# Altium PCB PCB1.PcbDoc
Units mm, origin at the board's own origin, x right, y up, seen from the top; angles counter-clockwise.
Board outline 150 x 90 mm, 2 copper layers (Top Layer, Bottom Layer), stack 1.569 mm thick; 23 components, 46 nets, 127 pads, 4 vias.
Unrouted connection lines stored in the file: 10.
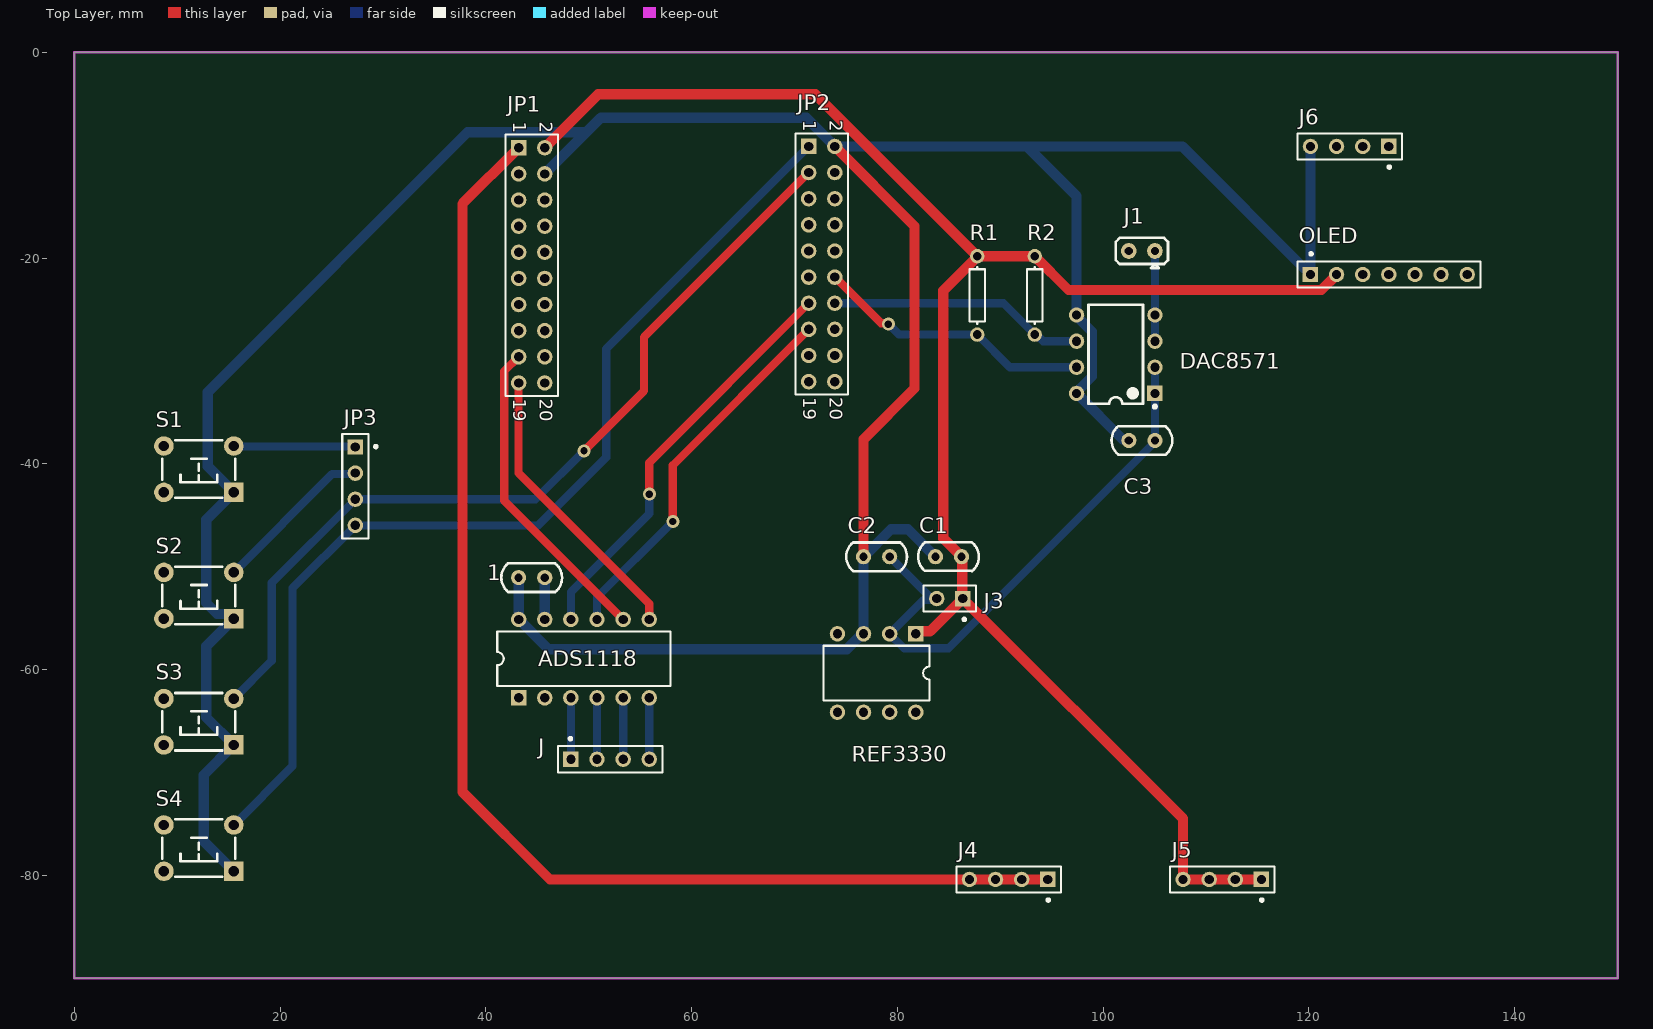
[diagram p0: Top Layer view]
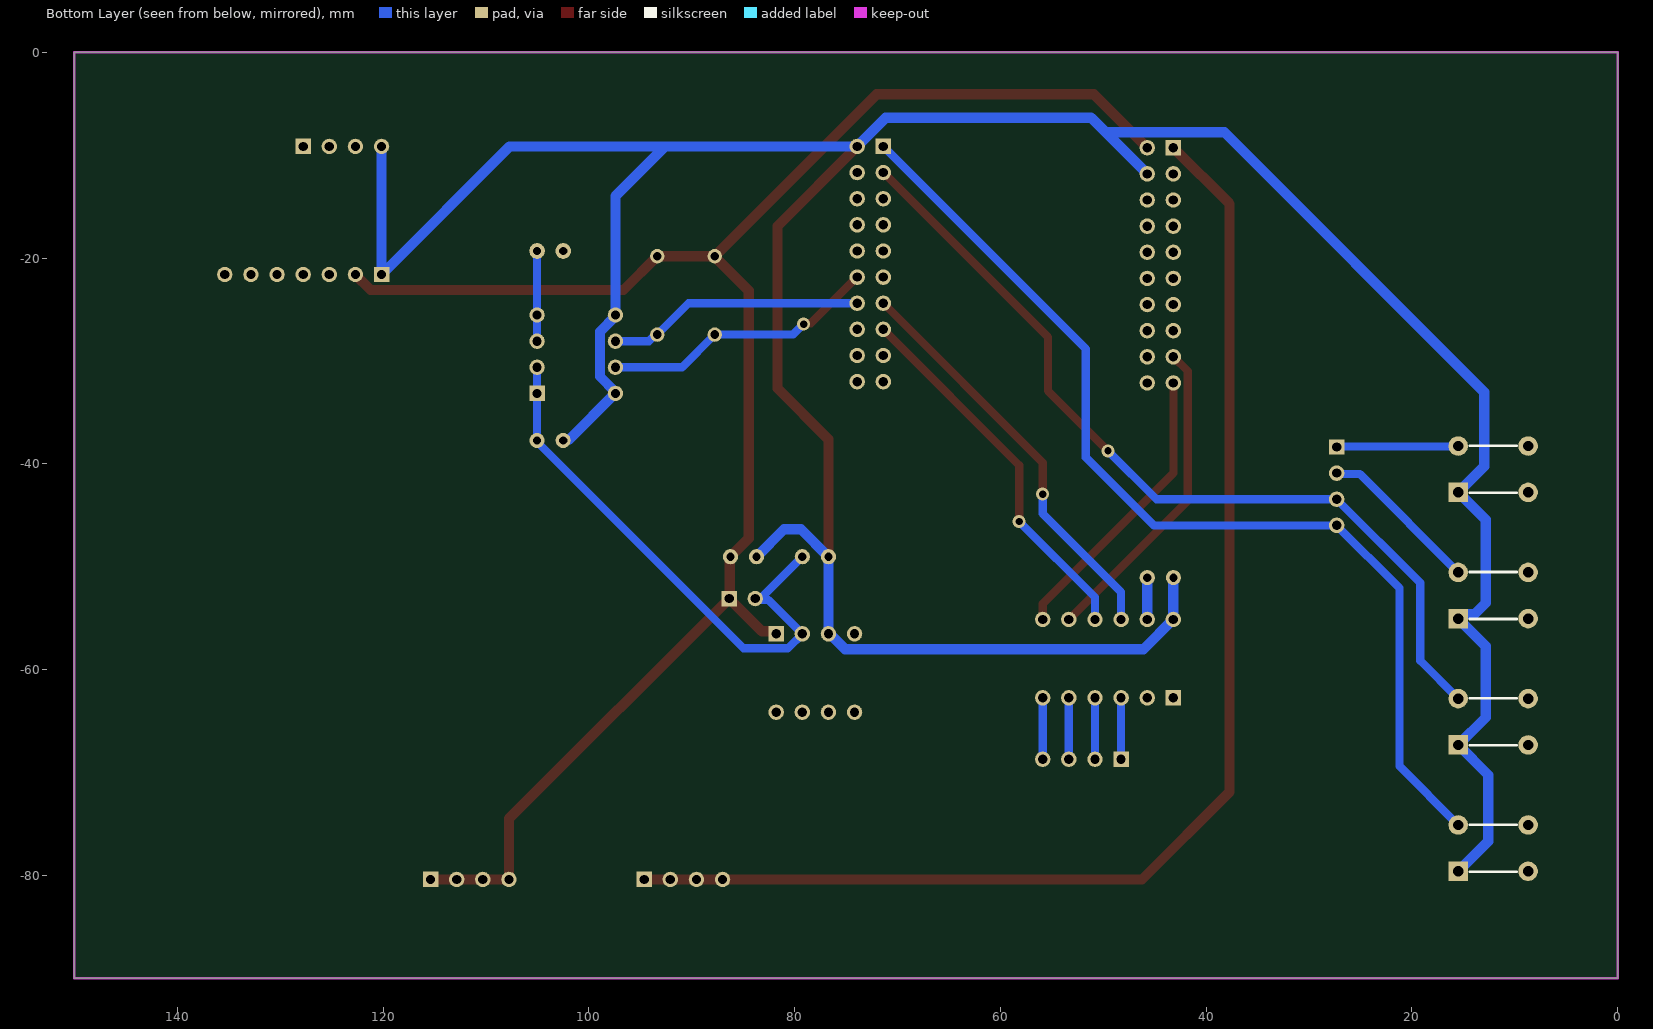
[diagram p1: Bottom Layer view, seen from below]
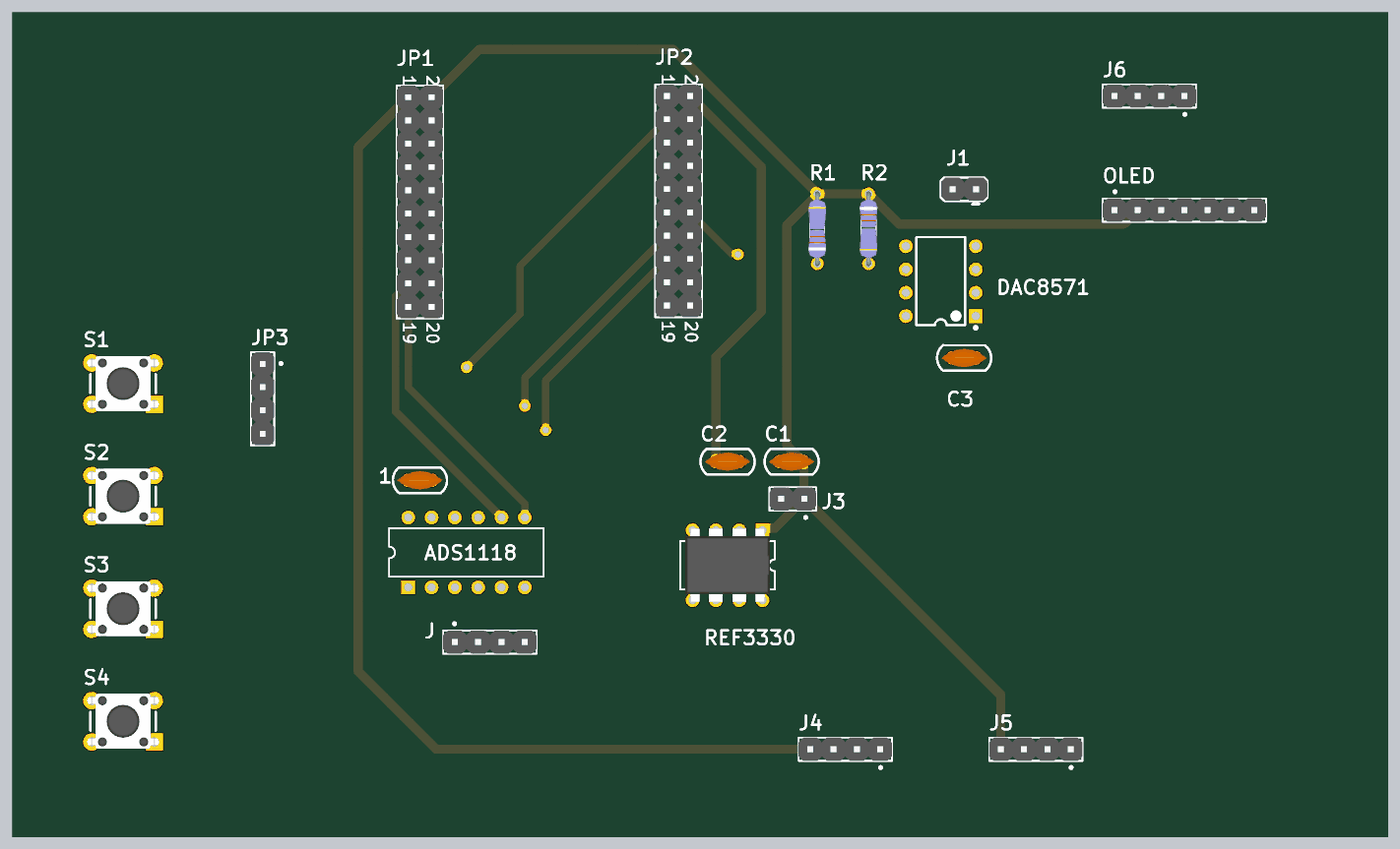
[diagram p2: 3D render of the assembled board from above, using the file's embedded part models]

## Layer stack, top to bottom
Top Solder: solder mask 0.0254, SM-001, Dk 4
Top Layer: signal copper 0.035
Dielectric 1: core 1.4986, Core-043, Dk 4.3
Bottom Layer: signal copper 0.035
Bottom Solder: solder mask 0.0254, SM-001, Dk 4

## Board outline
0,-90 150,-90 150,0 0,0

## Design rules (kind name [scope] priority, off if disabled: settings)
Clearance [All] p1: gap=0.254 ignorepadtopadclearanceinfootprint=FALSE except(0: Arc-Hole Track-Hole SMDPad-Hole THPad-Hole Via-Hole Fill-Hole Poly-Hole Region-Hole Text-Hole)
PolygonConnect [All] p1: connectstyle=Relief reliefconductorwidth=0.254 reliefentries=4 polygonreliefangle="90 Angle" airgapwidth=0.254
RoutingVias [All] p1: holewidth=0.711 width=1.27 viastyle="Through Hole" minholewidth=0.711 minwidth=1.27 maxholewidth=0.711 maxwidth=1.27
SolderMaskExpansion [All] p1: expansion=0.102 istentingtop=FALSE
Width VCC [InNet('5V')] p1: maxlimit=1 minlimit=1 preferedwidth=1 minimp=50.000000 maximp=50.000000 favimp=50.000000
Width VCC_2 [InNet('3.3V')] p2: maxlimit=1 minlimit=1 preferedwidth=1 minimp=50.000000 maximp=50.000000 favimp=50.000000
Width VCC_1 [InNet('3V3')] p3: maxlimit=1 minlimit=1 preferedwidth=1 minimp=50.000000 maximp=50.000000 favimp=50.000000
Width GND [InNet('GND')] p4: maxlimit=1 minlimit=1 preferedwidth=1 minimp=50.000000 maximp=50.000000 favimp=50.000000
Width [All] p5: maxlimit=0.8 minlimit=0.8 preferedwidth=0.8 minimp=50.000000 maximp=50.000000 favimp=50.000000
30 further rules are at their usual default settings.

## Components (designator, comment, footprint, x,y, rotation, side; value= is the part's Value field where it differs from the comment)
1 "0.1uF" cap-0.1 44.45,-51.054 r180 top
ADS1118 "ADS1118" DIP-12/SW 49.53,-58.928 r0 top
C1 "4.7uF" cap-0.1 84.963,-49.022 r0 top
C2 "4.7uF" cap-0.1 77.978,-49.022 r180 top
C3 "0.1uF" cap-0.1 103.759,-37.719 r180 top
DAC8571 "DAC-X" DIP-8#1 101.219,-29.337 r180 top
J "HEADER_RIGHT" HDR1X4 48.26,-68.707 r0 top
J1 "CON1" DIP-2 103.759,-19.304 r90 top
J3 "CON2" HDR1X2 86.36,-53.086 r180 top
J4 "CON4" HDR1X4 94.615,-80.391 r180 top
J5 "CON4" HDR1X4 115.379,-80.391 r180 top
J6 "CON4" HDR1X4 127.762,-9.144 r180 top
JP1 "HEADER 10X2" HDR2X10 43.18,-9.271 r270 top
JP2 "HEADER 10X2" HDR2X10 71.374,-9.144 r270 top
JP3 "4 HEADER" HDR1X4 27.305,-38.354 r270 top
OLED "SSD1351" HDR1X7 120.142,-21.59 r0 top
R1 "10K" AXIAL-0.3-R 87.757,-23.622 r90 top
R2 "10K" AXIAL-0.3-R 93.345,-23.622 r270 top
REF3330 "REF3330" DIP-8#2 81.788,-56.515 r180 top
S1 "" "TSW DIP-6*6*7" 12.094,-40.513 r180 top
S2 "" "TSW DIP-6*6*7" 12.094,-52.79 r180 top
S3 "" "TSW DIP-6*6*7" 12.094,-65.066 r180 top
S4 "" "TSW DIP-6*6*7" 12.094,-77.343 r180 top

## Footprints (in the part's own frame and the unit in brackets; to place one, negate y for a bottom-side part, rotate by r counter-clockwise, add the part's x,y. Pads: shape width x height; smd on the part's side, far side on the other; paste and mask are expansions set on the pad)
AXIAL-0.3-R [mm] "1/8W"
  round 1.4 hole 0.85: 1(-3.81,0) 2(3.81,0)
  silkscreen extent -2.77,-0.76 2.77,0.76, body extent -4.06,-0.97 4.06,0.97, height 1.94
cap-0.1 [mil] "瓷片电容"
  round 58 hole 31.5: 1(-50,0) 2(50,0)
  silkscreen extent -116,-55 116,55, body extent -97,-39 97,39, height 226
DIP-2 [mil]
  round 60 hole 32: 1(0,-50) 2(0,50)
  silkscreen extent -65,-100 50,100, body extent -50,-101 50,99, height 336
DIP-8#1 [mm]
  rect 1.5x1.5 hole 0.9: 1(-3.81,3.81)
  round 1.5 hole 0.9: 2(-3.81,1.27) 3(-3.81,-1.27) 4(-3.81,-3.81) 5(3.81,-3.81) 6(3.81,-1.27) 7(3.81,1.27) 8(3.81,3.81)
  silkscreen extent -3.95,-4.8 2.65,5.24
DIP-8#2 [mm]
  rect 1.5x1.5 hole 0.9: 1(0,0)
  round 1.5 hole 0.9: 2(2.54,0) 3(5.08,0) 4(7.62,0) 5(7.62,7.62) 6(5.08,7.62) 7(2.54,7.62) 8(0,7.62)
  silkscreen extent -1.34,1.16 8.96,6.46, body extent -0.82,-0.22 8.45,7.84, height 3.8
DIP-12/SW [mm] "DIP Switch; 12 Leads"
  rect 1.5x1.5 hole 0.9: 1(-6.35,-3.81)
  round 1.5 hole 0.9: 2(-3.81,-3.81) 3(-1.27,-3.81) 4(1.27,-3.81) 5(3.81,-3.81) 6(6.35,-3.81) 7(6.35,3.81) 8(3.81,3.81) 9(1.27,3.81) 10(-1.27,3.81) 11(-3.81,3.81) 12(-6.35,3.81)
  silkscreen extent -8.43,-2.65 8.41,2.65
HDR1X2 [mm] "Connector; Header; 2 Position"
  rect 1.5x1.5 hole 0.9: 1(0,0)
  round 1.5 hole 0.9: 2(2.54,0)
  silkscreen extent -1.27,-1.27 3.81,2.17, body extent -1.27,-1.27 3.81,1.27, height 8.54
HDR1X4 [mm] "Connector; Header; 4 Position"
  rect 1.5x1.5 hole 0.9: 1(0,0)
  round 1.5 hole 0.9: 2(2.54,0) 3(5.08,0) 4(7.62,0)
  silkscreen extent -1.27,-1.27 8.89,2.14, body extent -1.27,-1.27 8.89,1.27, height 8.54
HDR1X7 [mm] "Connector; Header; 7 Position"
  rect 1.5x1.5 hole 0.9: 1(0,0)
  round 1.5 hole 0.9: 2(2.54,0) 3(5.08,0) 4(7.62,0) 5(10.16,0) 6(12.7,0) 7(15.24,0)
  silkscreen extent -1.27,-1.27 16.51,2.14, body extent -1.27,-1.27 16.51,1.27, height 8.54
HDR2X10 [mm] "Connector; Header; 10x2 Position"
  rect 1.5x1.5 hole 0.9: 1(0,0)
  round 1.5 hole 0.9: 2(0,2.54) 3(2.54,0) 4(2.54,2.54) 5(5.08,0) 6(5.08,2.54) 7(7.62,0) 8(7.62,2.54) 9(10.16,0) 10(10.16,2.54) 11(12.7,0) 12(12.7,2.54) 13(15.24,0) 14(15.24,2.54) 15(17.78,0) 16(17.78,2.54) 17(20.32,0) 18(20.32,2.54) 19(22.86,0) 20(22.86,2.54)
  silkscreen extent -1.27,-1.27 24.13,3.81, body extent -1.27,-1.27 24.13,3.81, height 8.54
"TSW DIP-6*6*7" [mm] "6*6*7mm"
  rect 1.9x1.9 hole 1: 1(-3.4,2.25)
  round 1.9 hole 1: 2(-3.4,-2.25) 3(3.4,-2.25) 4(3.4,2.25)
  silkscreen extent -3.56,-2.79 3.56,2.79, body extent -4.11,-3 4.11,3, height 6.95

## Part data
1 C1 C2 C3: library part CAP, "Capacitor"
J1 J3 J4 J5 J6: "Connector"
JP3: "4 Pin Header"
R1 R2: library part RES2
S1 S2 S3 S4: library part SW-PB

## Via types
v1: diameter 1.27, hole 0.711, Top Layer to Bottom Layer, 4 vias

## Nets (pads, with @x,y where several pads share a name; then routed paths per layer and width w, separated by ;. In a path a pad name is that pad's centre, name@x,y a point inside that pad or via, vN(x,y) a via of type N, cw(c..) or ccw(c..) an arc to the next point about the centre after c; other vN are vias at no path point)
3.3V: 1.1 ADS1118.11 | length 4.1
  Bottom Layer w1: ADS1118.11 1.1
3V3: J4.1 J4.2 J4.3 J4.4 JP1.1 | length 125.3
  Top Layer w1: JP1.1 37.719,-14.732 37.719,-71.882 46.228,-80.391 J4.4 J4.3 J4.2 J4.1
5V: C1.2 J3.1 J5.1 J5.2 J5.3 J5.4 JP1.2 OLED.2 R1.2 R2.1 REF3330.1 | length 172.9
  Top Layer w1: JP1.2 50.927,-4.064 72.009,-4.064 R1.2 ; REF3330.1 82.027,-56.276 83.17,-56.276 J3.1 ; J5.1 J5.2 J5.3 J5.4 107.759,-74.486 J3.1 ; OLED.2 122.682,-21.616 121.204,-23.094 96.627,-23.094 R2.1 R1.2 ; J3.1 86.296,-53.023 86.296,-49.085 C1.2 84.455,-47.244 84.455,-23.177 87.757,-19.875 R1.2
GND: 1.2 ADS1118.12 C1.1 C2.2 C3.2 DAC8571.5 DAC8571.8 J6.1 J6.2 J6.3 J6.4 JP1.4 JP2.2 OLED.1 REF3330.3 S1.1 S2.1 S3.1 S4.1 | length 333.3
  Top Layer w1: JP2.2 81.661,-16.891 81.661,-32.639 76.708,-37.592 C2.2
  Bottom Layer w1: S4.1 12.573,-76.672 12.573,-70.237 S3.1 12.827,-64.649 12.827,-57.707 S2.1 15.044,-54.59 13.9,-54.59 12.827,-53.516 12.827,-45.43 S1.1 12.954,-40.223 12.954,-33.02 38.207,-7.767 49.764,-7.767 ; 1.2 ADS1118.12 46.081,-58.019 75.069,-58.019 76.573,-56.515 REF3330.3 C2.2 79.375,-46.355 81.026,-46.355 C1.1 ; JP1.4 49.764,-7.767 ; C3.2 102.398,-37.628 101.89,-37.628 DAC8571.8 97.409,-33.012 98.913,-31.508 98.913,-27.166 97.409,-25.662 DAC8571.5 97.409,-13.97 92.583,-9.144 ; J6.4 OLED.1 107.696,-9.144 92.583,-9.144 ; 49.764,-7.767 51.181,-6.35 71.146,-6.35 73.914,-9.118 JP2.2 92.583,-9.144
NetADS1118_3: ADS1118.3 J.1 | length 6
  Bottom Layer w0.8: J.1 ADS1118.3
NetADS1118_4: ADS1118.4 J.2 | length 6
  Bottom Layer w0.8: J.2 ADS1118.4
NetADS1118_5: ADS1118.5 J.3 | length 6
  Bottom Layer w0.8: J.3 ADS1118.5
NetADS1118_6: ADS1118.6 J.4 | length 6
  Bottom Layer w0.8: J.4 ADS1118.6
NetDAC8571_VOUT: DAC8571.3 DAC8571.4 J1.1 | length 8.8
  Bottom Layer w0.8: DAC8571.3 DAC8571.4 J1.1
P1.2: JP2.11
P1.3: JP2.9
P1.4: JP2.7 OLED.7
P1.5: JP2.5
P1.6: JP1.9
P2.0: JP2.4 JP3.1 S1.2 | length 11.8
  Bottom Layer w0.8: S1.2 15.54,-38.308 27.259,-38.308 JP3.1
P2.2: JP2.6 JP3.2 S2.2 | length 15.8
  Bottom Layer w0.8: S2.2 25.057,-40.976 27.223,-40.976 JP3.2
P2.3: JP2.18
P2.4: JP2.3 JP3.3 S3.2 | length 84.5
  Top Layer w0.8: v1(49.53,-38.735) 55.372,-32.893 55.372,-27.686 JP2.3
  Bottom Layer w0.8: S3.2 19.177,-59.133 19.177,-51.562 JP3.3 44.831,-43.434 v1(49.53,-38.735)
P2.5: JP2.1 JP3.4 S4.2 | length 99.5
  Bottom Layer w0.8: S4.2 21.209,-69.378 21.209,-52.07 JP3.4 45.085,-45.974 51.689,-39.37 51.689,-28.829 JP2.1
P2.6: JP2.16
P2.7: JP1.15 OLED.3
P3.0: DAC8571.7 JP2.12 R1.1 | length 27.1
  Top Layer w0.8: JP2.12 78.396,-26.326 79.031,-26.326 v1(79.121,-26.416)
  Bottom Layer w0.8: v1@79.158,-26.453 80.137,-27.432 R1.1 90.932,-30.607 DAC8571.7
P3.1: DAC8571.6 JP2.14 R2.2 | length 25
  Bottom Layer w0.8: JP2.14 90.297,-24.384 R2.2 93.507,-27.432 94.142,-28.067 DAC8571.6
P3.2: JP1.13
P3.3: JP1.7 OLED.4
P3.4: JP1.5
P3.5: JP1.20
P3.6: JP1.18 OLED.5
P3.7: JP2.17 OLED.6
P4.0: ADS1118.9 JP2.15 | length 36.7
  Top Layer w0.8: v1(58.166,-45.593) 58.166,-40.132 JP2.15
  Bottom Layer w0.8: ADS1118.9 50.8,-52.959 v1(58.166,-45.593)
P4.1: ADS1118.7 JP1.19 | length 28.2
  Top Layer w0.8: JP1.19 43.18,-40.894 55.88,-53.594 ADS1118.7
P4.2: ADS1118.8 JP1.17 | length 30.9
  Top Layer w0.8: JP1.17 41.776,-30.995 41.776,-37.457 41.776,-43.554 ADS1118.8
P4.3: ADS1118.10 JP2.13 | length 40.3
  Top Layer w0.8: v1(55.88,-42.945) 55.88,-39.878 JP2.13
  Bottom Layer w0.8: ADS1118.10 48.26,-52.451 55.88,-44.831 v1(55.88,-42.945)
P6.0: JP1.6
P6.1: JP1.8
P6.2: JP1.10
P6.3: JP1.12
P6.4: JP1.14
P6.5: JP1.3
P6.6: JP1.11
P7.0: JP1.16
P7.4: JP2.8
P8.1: JP2.20
P8.2: JP2.19
RST: JP2.10
VREF: C2.1 C3.1 DAC8571.1 DAC8571.2 J3.2 REF3330.2 | length 53.5
  Bottom Layer w0.8: C2.1 83.178,-52.952 83.686,-52.952 J3.2 ; J3.2@83.178,-53.22 82.543,-53.22 REF3330.2 80.652,-57.919 84.956,-57.919 105.029,-37.846 DAC8571.1 DAC8571.2
pads on no net: ADS1118.1 ADS1118.2 J1.2 REF3330.4 REF3330.5 REF3330.6 REF3330.7 REF3330.8 S1.3 S1.4 S2.3 S2.4 S3.3 S3.4 S4.3 S4.4

## Keep-outs
Keep-Out Layer:
  the board outline again, w0.254

## Text inside footprints (layer, text, board x,y; h text height)
JP1: Top Overlay "20" at 45.212,-33.655 h1.27 r270; Top Overlay "19" at 42.672,-33.655 h1.27 r270; Top Overlay "1" at 42.672,-6.731 h1.27 r270; Top Overlay "2" at 45.212,-6.731 h1.27 r270
JP2: Top Overlay "20" at 73.406,-33.528 h1.27 r270; Top Overlay "19" at 70.866,-33.528 h1.27 r270; Top Overlay "1" at 70.866,-6.604 h1.27 r270; Top Overlay "2" at 73.406,-6.604 h1.27 r270